# Altium PCB node_mcu.PcbDoc
Units mm, origin at the board's own origin, x right, y up, seen from the top; angles counter-clockwise.
Board outline 106.17 x 92.46 mm, 2 copper layers (Top Layer, Bottom Layer); 45 components, 41 nets, 167 pads, 0 vias.
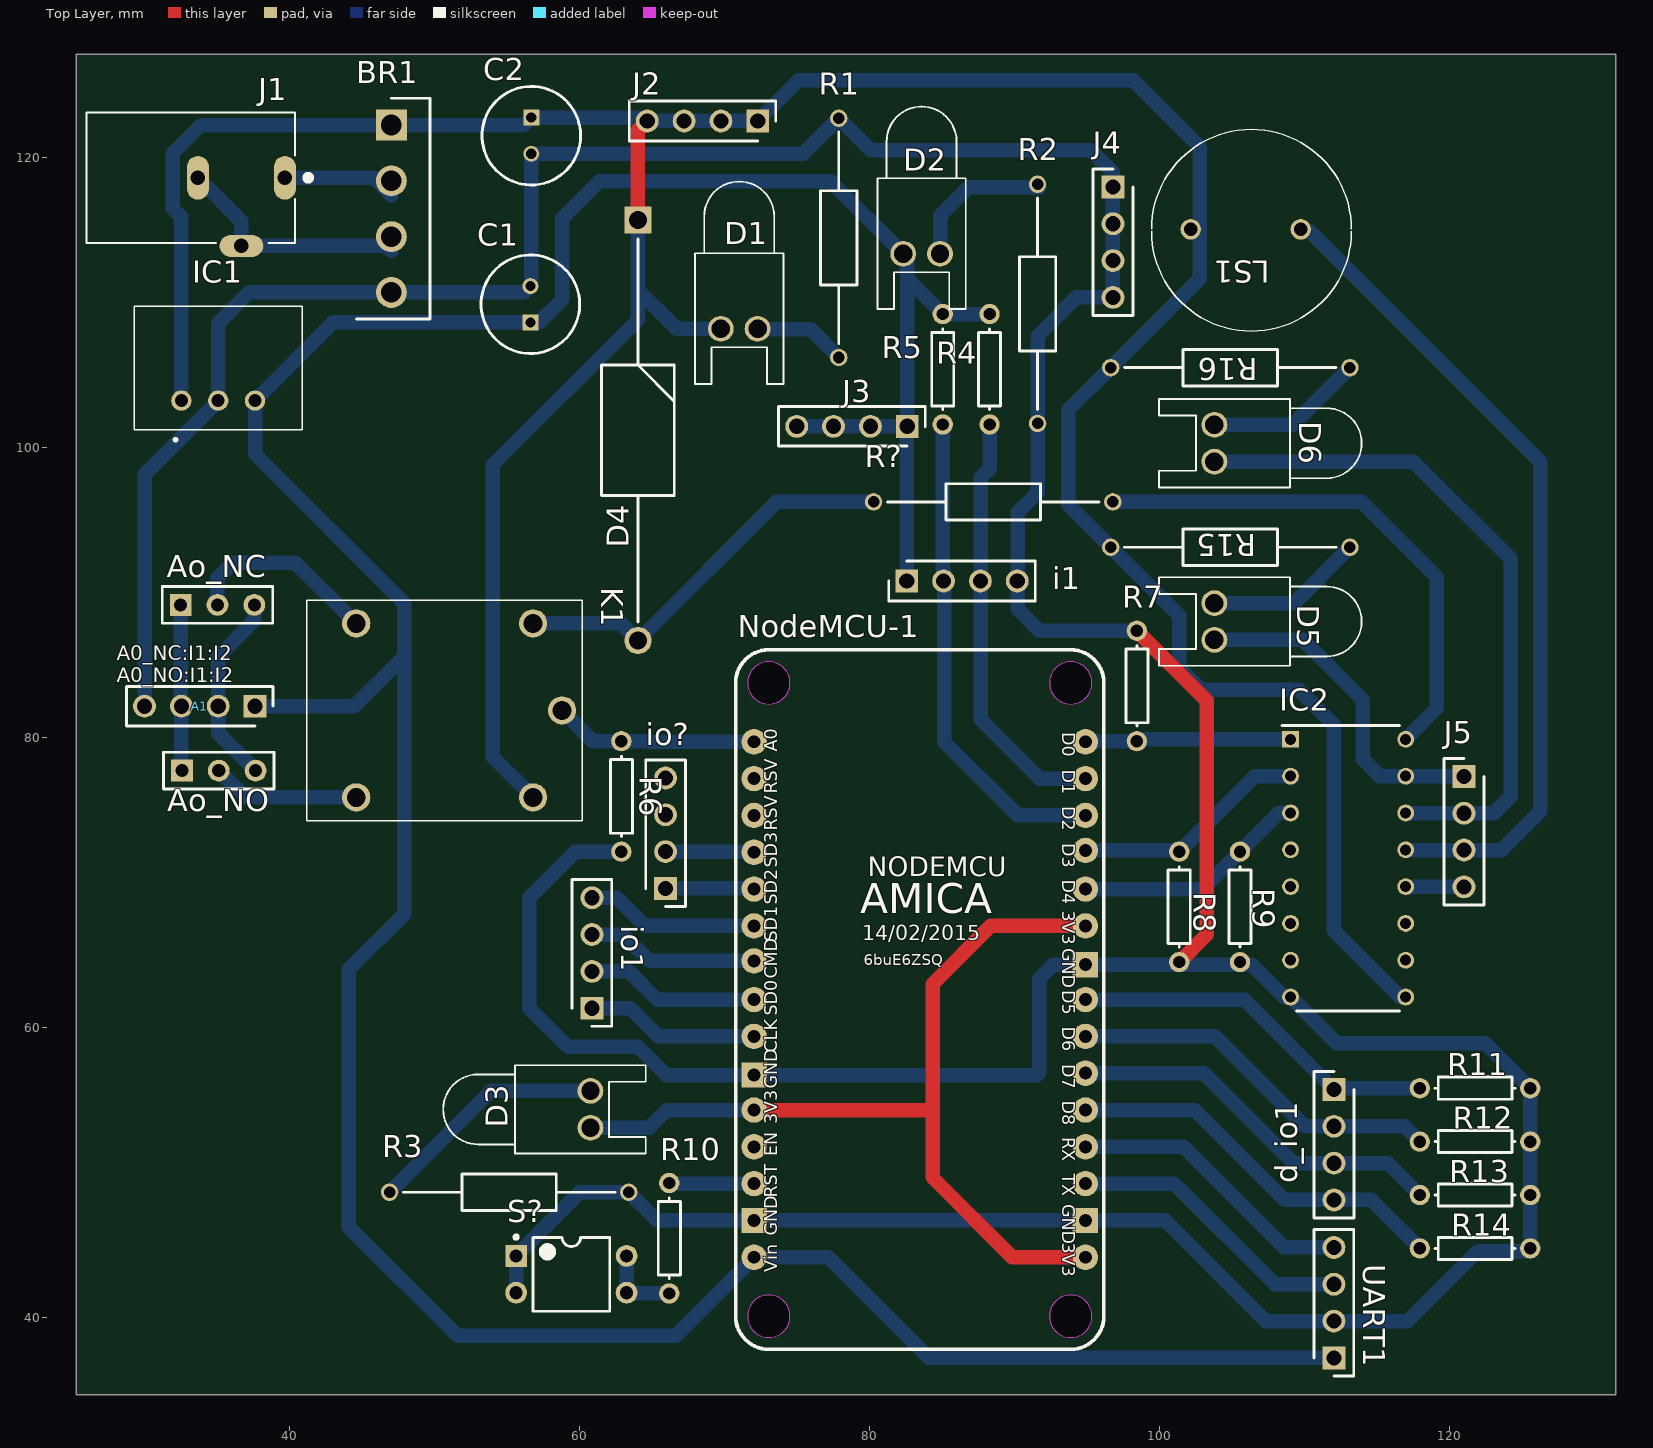
[diagram p0: Top Layer view]
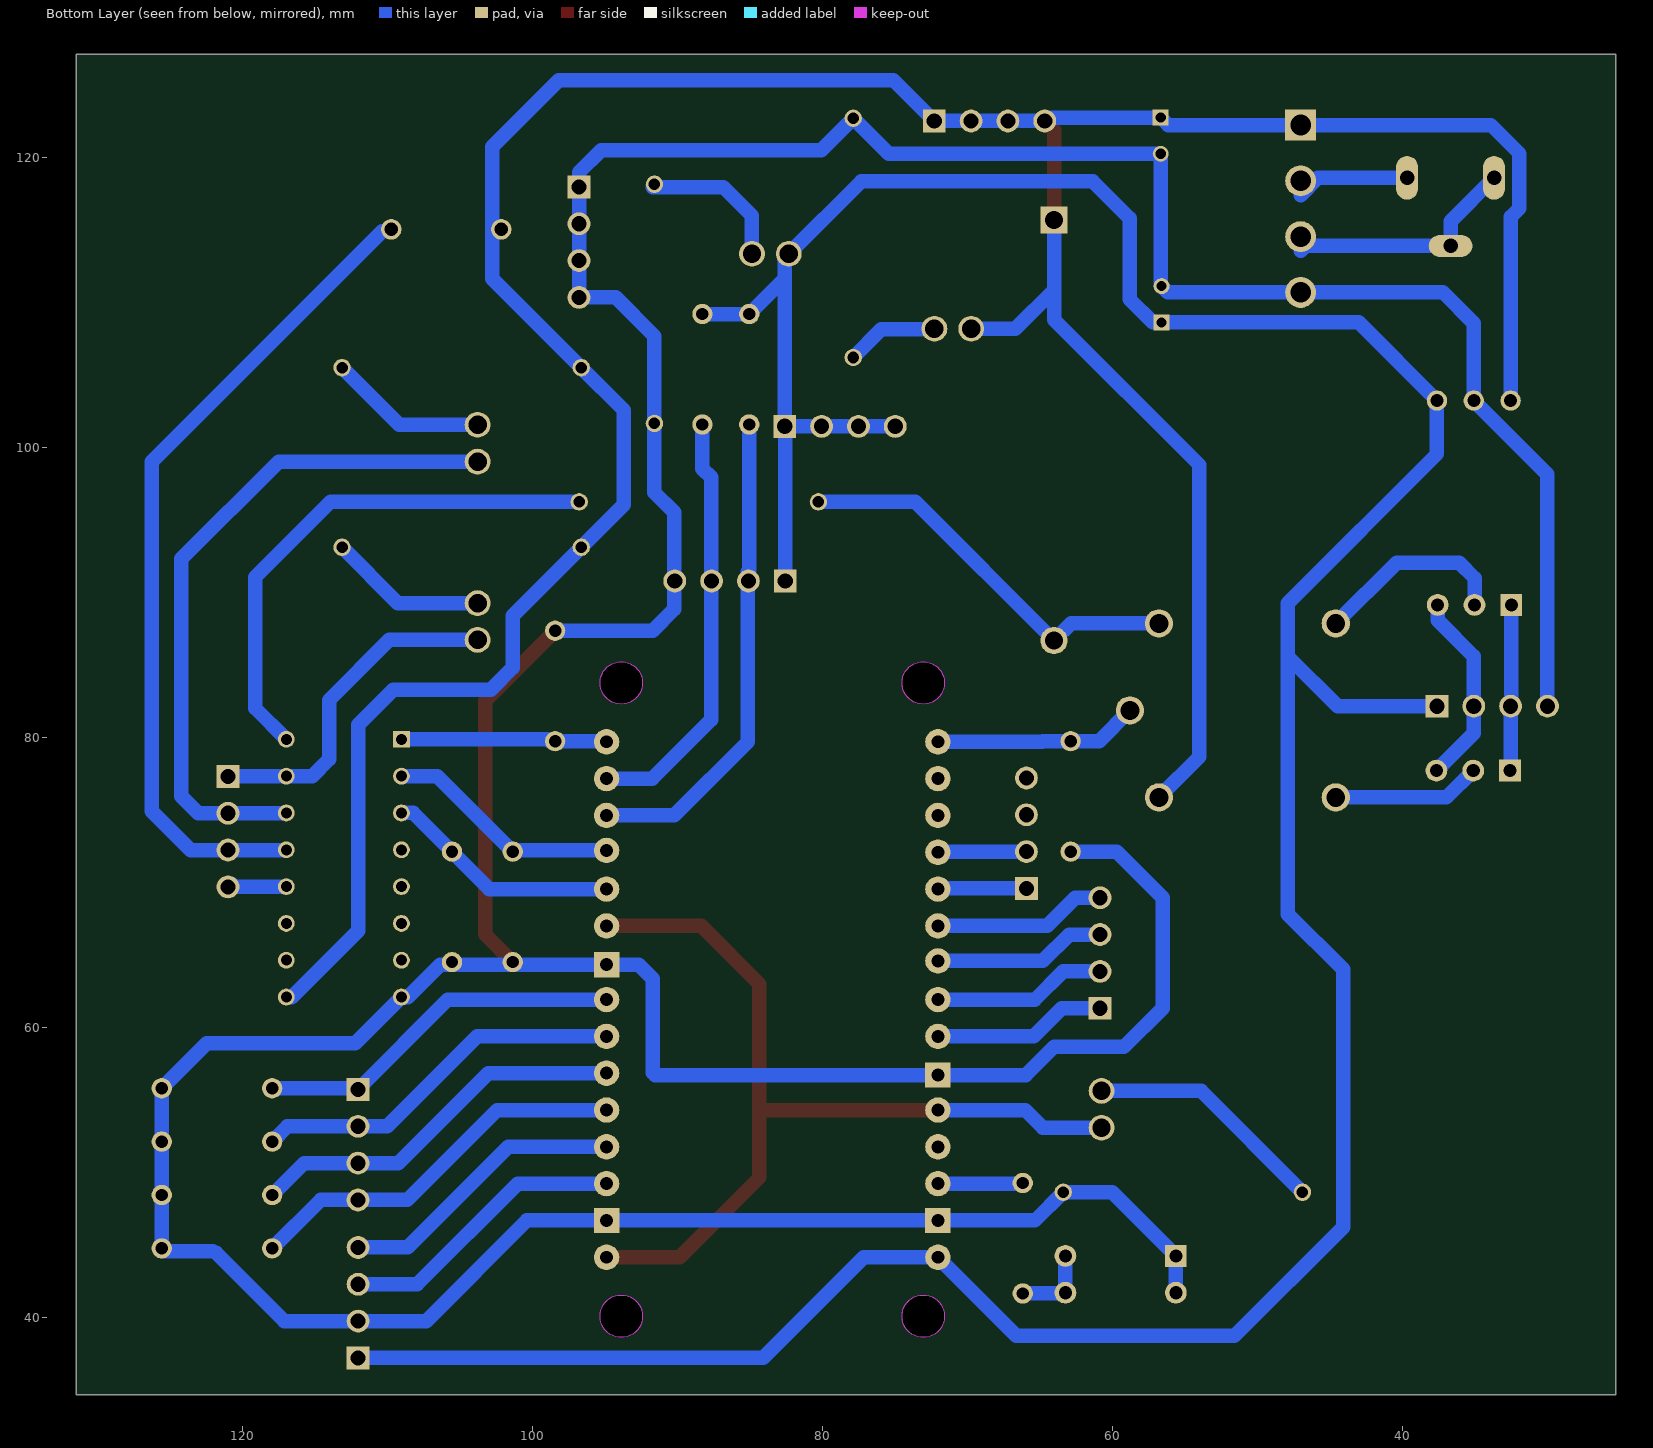
[diagram p1: Bottom Layer view, seen from below]
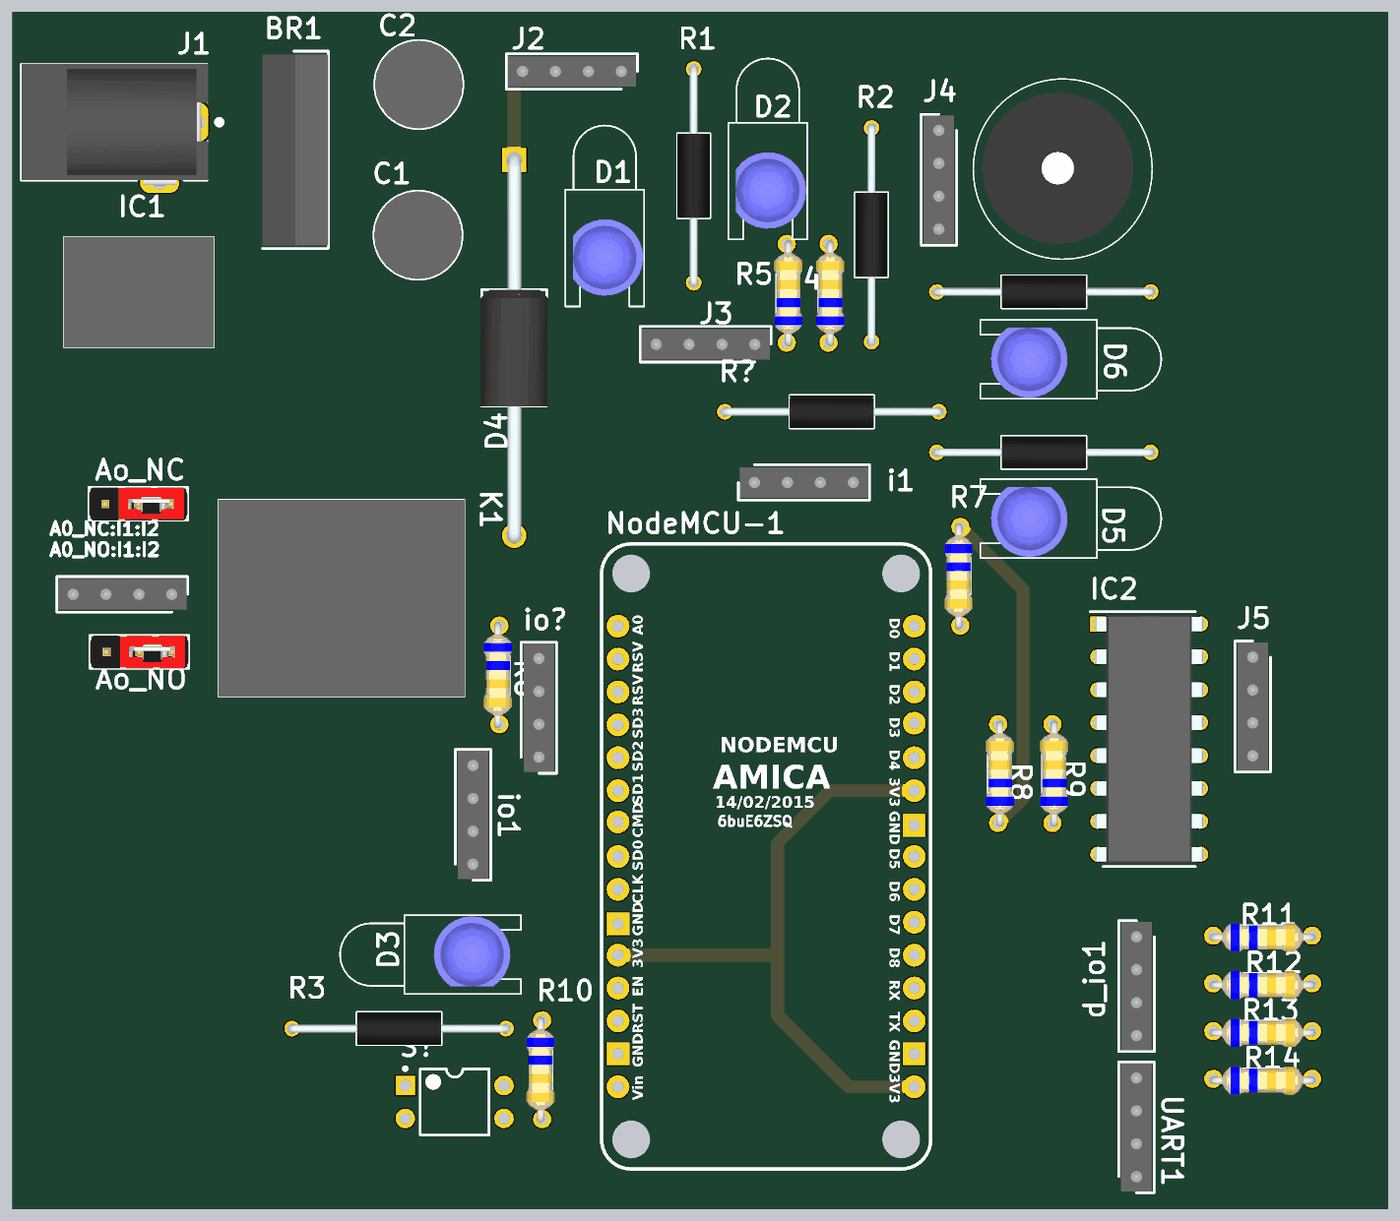
[diagram p2: 3D render of the assembled board from above, using the file's embedded part models]

## Layer stack, top to bottom
Top Solder: solder mask 0.0102, Solder Resist, Dk 3.5
Top Layer: signal copper 0.0356
Dielectric 1: dielectric 0.32, FR-4, Dk 4.8
Bottom Layer: signal copper 0.508
Bottom Solder: solder mask 0.0102, Solder Resist, Dk 3.5

## Board outline
131.445,127.127 131.445,34.671 25.273,34.671 25.273,127.127

## Design rules (kind name [scope] priority, off if disabled: settings)
Clearance Clearance_1 [All] p1: gap=0.5 ignorepadtopadclearanceinfootprint=FALSE
Clearance [All] p2: gap=0.5 ignorepadtopadclearanceinfootprint=FALSE
PolygonConnect [All] p1: connectstyle=Relief reliefconductorwidth=0.254 reliefentries=4 polygonreliefangle="90 Angle" airgapwidth=0.254
RoomDefinition bee_hive_1 [InComponentClass('bee_hive_1')] p1: confinementstyle=ConfineIn formatcopy=TRUE lockcomponents=FALSE outline 25.4,34.671 131.445,34.671 131.445,127.254 25.4,127.254
RoutingVias [All] p1: holewidth=0.711 width=1.27 viastyle="Through Hole" minholewidth=0.711 minwidth=1.27 maxholewidth=0.711 maxwidth=1.27
SolderMaskExpansion [All] p1: expansion=0.102
Width [All] p1: maxlimit=2 minlimit=0.5 preferedwidth=1 minimp=50.000000 maximp=50.000000 favimp=50.000000
30 further rules are at their usual default settings.

## Components (designator, comment, footprint, x,y, rotation, side; value= is the part's Value field where it differs from the comment)
A1 "A0" HDRV4W87P0X254_1X4_991X236X1155P 37.592,82.169 r180 top
Ao_NC "Header 3" HDR1X3 32.462,89.156 r0 top locked
Ao_NO "Header 3" HDR1X3 32.55,77.724 r0 top
BR1 "3KBP04M-E4_51" TO385P508X1473X1168-4P 46.998,122.259 r270 top
C1 "0.1uf" CAPPRD250W50D680H1250 56.587,108.644 r90 top
C2 "0.33uf" CAPPRD250W50D680H1250 56.65,122.774 r270 top
D1 "12v" LED-0 70.993,108.204 r180 top
D2 "5v" LED-0 83.574,113.376 r180 top
D3 "5v" LED-0 60.731,54.356 r270 top
D4 "1n4007" DIOAD2902W106L900D500 64.008,115.697 r270 top
D5 "5v" LED-0 103.771,88.011 r90 top
D6 "5v" LED-0 103.771,100.31 r90 top
d_io1 "d_io" HDRV4W87P0X254_1X4_991X236X1155P 112.024,55.726 r270 top
i1 "i2c" HDRV4W87P0X254_1X4_991X236X1155P 82.55,90.805 r0 top
IC1 "173950578" 173950578 32.512,103.251 r0 top
IC2 "ULN2003A" DIP794W56P254L1918H533Q16N 112.997,70.993 r0 top
io1 "io" HDRV4W87P0X254_1X4_991X236X1155P 60.833,61.334 r90 top
io? "io" HDRV4W87P0X254_1X4_991X236X1155P 65.913,69.596 r90 top
J1 "PJ-102B" *CUI_PJ-102B 33.155,118.618 r180 top
J2 "ip_vlts" HDRV4W87P0X254_1X4_991X236X1155P 72.271,122.537 r180 top
J3 "5v" HDRV4W87P0X254_1X4_991X236X1155P 82.581,101.473 r180 top
J4 "gnd" HDRV4W87P0X254_1X4_991X236X1155P 96.774,117.986 r270 top
J5 "0022032041" HDRV4W87P0X254_1X4_991X236X1155P 120.988,77.323 r270 top
K1 "0476618" 0476618 50.673,81.876 r180 top
LS1 "254-15210-ROX" 25415210ROX 102.138,115.062 r180 top
NodeMCU-1 "NodeMCU V1.0 ESP-12E" "NodeMCU V1.0 ESP-12E" 70.722,85.959 r0 top
R1 "1k" RESAD1650W60L650D250 77.859,122.724 r270 top
R2 "330E" RESAD1650W60L650D250 91.575,101.673 r90 top
R3 "100E" RESAD1650W60L650D250 63.373,48.641 r180 top
R4 "Res1" AXIAL-0.3 88.265,105.41 r90 top value=2.2K
R5 "Res1" AXIAL-0.3 85.033,105.41 r90 top value=2.2K
R6 "Res1" AXIAL-0.3 62.865,75.946 r270 top value=10K
R7 "Res1" AXIAL-0.3 98.425,83.566 r270 top value=10K
R8 "Res1" AXIAL-0.3 101.346,68.326 r90 top value=10K
R9 "Res1" AXIAL-0.3 105.537,68.326 r90 top value=10K
R10 "Res1" AXIAL-0.3 66.167,45.466 r270 top value=10K
R11 "Res1" AXIAL-0.3 121.753,55.813 r0 top value=10K
R12 "Res1" AXIAL-0.3 121.753,52.13 r0 top value=10K
R13 "Res1" AXIAL-0.3 121.753,48.447 r0 top value=10K
R14 "Res1" AXIAL-0.3 121.753,44.764 r0 top value=10K
R15 "1k" RESAD1650W60L650D250 96.62,93.13 r0 top
R16 "1k" RESAD1650W60L650D250 96.62,105.519 r0 top
R? "100E" RESAD1650W60L650D250 80.264,96.266 r0 top
S? "SW DIP-2" DIP-4 59.413,42.976 r0 top
UART1 "UART" HDRV4W87P0X254_1X4_991X236X1155P 112.014,37.211 r90 top

## Footprints (in the part's own frame and the unit in brackets; to place one, negate y for a bottom-side part, rotate by r counter-clockwise, add the part's x,y. Pads: shape width x height; smd on the part's side, far side on the other; paste and mask are expansions set on the pad)
0476618 [mm]
  round 1.95 hole 1.3: 1(-6.1,-6) 2(6.1,-6) 3(6.1,6) 4(-6.1,6) 5(-8.1,0)
  silkscreen extent -9.5,-7.6 9.5,7.6, body extent -9.5,-7.6 9.5,7.6, height 15
25415210ROX [mm]
  round 1.417 hole 0.911: 1(0,0) 2(-7.59,0)
  silkscreen extent -11.09,-6.9 2.7,7.02, body extent -9.66,-5.85 2.04,5.85, height 9.31
173950578 [mm]
  round 1.4 hole 0.9: 1(0,0) 2(2.54,0) 3(5.08,0)
  silkscreen extent -3.26,-2.8 8.34,6.5, body extent -3.26,-2 8.34,6.5, height 10.5
*CUI_PJ-102B [mm]
  oval 1.508x3.016 hole 1: 1(-6.5,0) 2(-0.5,0)
  oval 3.016x1.508 hole 1: 3(-3.5,4.7)
  silkscreen extent -8.3,-4.5 7.2,4.5, body extent -7.24,-4.52 7.16,4.88, height 11.01
AXIAL-0.3 [mm] "Axial Device, Thru-Hole; 2 Leads; 0.3 in Pin Spacing"
  round 1.4 hole 0.85: 1(-3.81,0) 2(3.81,0)
  silkscreen extent -2.77,-0.76 2.77,0.76, body extent -4.08,-1.27 4.08,1.02, height 2.44
CAPPRD250W50D680H1250 [mm]
  rect 1.1x1.1 hole 0.7: 1(0,0)
  round 1.1 hole 0.7: 2(2.5,0)
  silkscreen extent -2.15,-3.4 4.65,3.4, body extent -2.15,-3.4 4.65,3.4, height 12.5
DIOAD2902W106L900D500 [mm]
  rect 1.875x1.875 hole 1.25: 1(0,0)
  round 1.875 hole 1.25: 2(29,0)
  silkscreen extent 1.29,-2.5 27.71,2.5, body extent -0.53,-2.61 29.55,2.61, height 5.21
DIP794W56P254L1918H533Q16N [mm]
  rect 1.16x1.16 hole 0.76: 1(-3.97,8.89)
  round 1.16 hole 0.76: 2(-3.97,6.35) 3(-3.97,3.81) 4(-3.97,1.27) 5(-3.97,-1.27) 6(-3.97,-3.81) 7(-3.97,-6.35) 8(-3.97,-8.89) 9(3.97,-8.89) 10(3.97,-6.35) 11(3.97,-3.81) 12(3.97,-1.27) 13(3.97,1.27) 14(3.97,3.81) 15(3.97,6.35) 16(3.97,8.89)
  silkscreen extent -4.55,-9.84 3.55,9.84, body extent -4.11,-9.59 4.11,9.59, height 5.33
DIP-4 [mm] "DIP; 4 Leads; Row Spacing 7.62 mm; Pitch 2.54 mm"
  rect 1.5x1.5 hole 0.9: 1(-3.81,1.27)
  round 1.5 hole 0.9: 2(-3.81,-1.27) 3(3.81,-1.27) 4(3.81,1.27)
  silkscreen extent -3.93,-2.55 2.65,2.69, body extent -3.15,-2.5 3.15,2.5, height 5.6
HDR1X3 [mm] "Connector; Header; 3 Position"
  rect 1.5x1.5 hole 0.9: 1(0,0)
  round 1.5 hole 0.9: 2(2.54,0) 3(5.08,0)
  silkscreen extent -1.27,-1.27 6.35,1.27, body extent -1.27,-1.27 6.35,1.27, height 9
HDRV4W87P0X254_1X4_991X236X1155P [mm]
  rect 1.575x1.575 hole 1.05: 1(0,0)
  round 1.575 hole 1.05: 2(2.54,0) 3(5.08,0) 4(7.62,0)
  silkscreen extent -1.24,-1.37 8.86,1.37, body extent -1.14,-1.18 8.76,1.18, height 11.55
LED-0 [mil] "LED; 2 Leads"
  round 70 hole 50: 1(50,0) 2(-50,0)
  silkscreen extent -120,-400 120,150, body extent -116,-115 96,117, height 362
"NodeMCU V1.0 ESP-12E" [mil]
  round 115 hole 115 unplated paste-300 mask-300: 0(91,-1806) 0(91,-86) 0(911,-1806) 0(911,-86)
  round 69 hole 35: 3V3(51,-1246) 3V3(951,-1646) 3V3(951,-746) A0(51,-246) CLK(51,-1046) CMD(51,-841) D0(951,-246) D1(951,-346) D2(951,-446) D3(951,-541) D4(951,-646) D5(951,-946) D6(951,-1046) D7(951,-1146) D8(951,-1246) EN(51,-1346) RST(51,-1446) RSV(51,-446) RSV(51,-346) RX(951,-1346) SD0(51,-946) SD1(51,-746) SD2(51,-646) SD3(51,-546) TX(951,-1446) VIN(51,-1646)
  rect 69x69 hole 35: GND(51,-1546) GND(51,-1151) GND(951,-1546) GND(951,-851)
  Keep-Out Layer circle w2: c911,-1806 r57.5
  Keep-Out Layer circle w2: c91,-1806 r57.5
  Keep-Out Layer circle w2: c911,-86 r57.5
  Keep-Out Layer circle w2: c91,-86 r57.5
  silkscreen extent 1,-1896 1001,4
RESAD1650W60L650D250 [mm]
  round 1.2 hole 0.8: 1(0,0) 2(16.5,0)
  silkscreen extent 0.95,-1.25 15.55,1.25, body extent -0.3,-1.25 16.8,1.25, height 2.49
TO385P508X1473X1168-4P [mm]
  rect 2.13x2.13 hole 1.42: 1(0,0)
  round 2.13 hole 1.42: 2(3.85,0) 3(7.7,0) 4(11.55,0)
  silkscreen extent -1.85,-2.41 13.39,2.67, body extent -1.59,-2.41 13.14,2.67, height 11.17

## Part data
A1 d_io1 i1 io1 io? J2 J3 J4 UART1: library part 0022032041, "Connector", Manufacturer_Name=Molex, Mouser Part Number=N/A, Datasheet Link=http://www.molex.com/pdm_docs/sd/022032041_sd.pdf, Height=11.55mm, Manufacturer_Part_Number=0022032041, Mouser Price/Stock=https://www.mouser.com/Search/Refine.aspx?Keyword=N%2FA
Ao_NC Ao_NO: "Header, 3-Pin", LatestRevisionDate=17-Jul-2002, LatestRevisionNote="Re-released for DXP Platform.", Publisher="Altium Limited"
BR1: "Bridge Rectifier", Manufacturer_Name=Vishay, Manufacturer_Part_Number=3KBP04M-E4/51, Mouser Part Number=625-3KBP04M-E4, RS Part Number=8116150, Datasheet Link=https://www.vishay.com/docs/88888/3kbp08m.pdf, Height=5.08mm, Mouser Price/Stock=https://www.mouser.com/Search/Refine.aspx?Keyword=625-3KBP04M-E4, RS Price/Stock=https://uk.rs-online.com/web/p/products/8116150
C1 C2: library part BKME500ELL100MF11D, "Capacitor Polarised", Manufacturer_Name="United Chemi-Con", Mouser Part Number=661-BKME500ELL100MF1, Datasheet Link=http://www.mouser.com/datasheet/2/420/al-kmebp-e-140701-514734.pdf, Height=12.5mm, Manufacturer_Part_Number=BKME500ELL100MF11D, Mouser Price/Stock=https://www.mouser.com/Search/Refine.aspx?Keyword=661-BKME500ELL100MF1
D1 D2 D3 D5 D6: library part LED0, "Typical INFRARED GaAs LED", LatestRevisionDate=08-Jul-2005, LatestRevisionNote="Mech Layer 1 removed.", PackageDescription="LED; 2 Leads", PackageReference=LED-0, Published=8-Jun-2000, Publisher="Altium Limited"
D4: library part 1.5KE68CA-T, "Diode", Manufacturer_Name="Diodes Inc.", Mouser Part Number=621-1.5KE68CA-T, Datasheet Link=https://www.diodes.com/assets/Datasheets/ds21503.pdf, Manufacturer_Part_Number=1.5KE68CA-T, Mouser Price/Stock=https://www.mouser.com/Search/Refine.aspx?Keyword=621-1.5KE68CA-T
IC1: "Integrated Circuit", Manufacturer_Name="Wurth Elektronik", Mouser Part Number=710-173950578, RS Part Number=1447817P, Datasheet Link=https://katalog.we-online.com/pm/datasheet/173950578.pdf, Height=10.5mm, Manufacturer_Part_Number=173950578, Mouser Price/Stock=https://www.mouser.com/Search/Refine.aspx?Keyword=710-173950578, RS Price/Stock=http://uk.rs-online.com/web/p/products/1447817P
IC2: "Integrated Circuit", Manufacturer_Name=STMicroelectronics, Mouser Part Number=511-ULN2003A, RS Part Number=6868209, Allied_Number=70014189, Allied Price/Stock=http://www.alliedelec.com/stmicroelectronics-uln2003a/70014189/, ComponentLink1Description=datashet, ComponentLink1URL=https://www.seeedstudio.com/document/pdf/ULN2003%20Datasheet.pdf, Datasheet Link=http://www.st.com/web/en/resource/technical/document/datasheet/CD00001244.pdf, Height=5.33mm, Manufacturer_Part_Number=ULN2003A, Mouser Price/Stock=https://www.mouser.com/Search/Refine.aspx?Keyword=511-ULN2003A, RS Price/Stock=http://uk.rs-online.com/web/p/products/6868209
J5: "Connector", Manufacturer_Name=Molex, Mouser Part Number=N/A, Datasheet Link=http://www.molex.com/pdm_docs/sd/022032041_sd.pdf, Height=11.55mm, Manufacturer_Part_Number=0022032041, Mouser Price/Stock=https://www.mouser.com/Search/Refine.aspx?Keyword=N%2FA
K1: "Relay or Contactor", Manufacturer_Name="RS Components", ComponentLink1Description=datasheet, ComponentLink1URL=https://www.hobbytronics.co.uk/datasheets/songle-12v-relay.pdf, Datasheet Link=https://docs-emea.rs-online.com/webdocs/1583/0900766b81583163.pdf, Height=15mm, Manufacturer_Part_Number=0476618
LS1: "Loudspeaker or Buzzer", Manufacturer_Name=Kobitone, Datasheet Link=https://www.mouser.de/datasheet/2/209/KT-400269-1172018.pdf, Height=8.51mm, Manufacturer_Part_Number=254-15210-ROX
NodeMCU-1: "NodeMCU V1.0 ESP8266 (ESP-12E)"
R1 R2 R3 R15 R16 R?: library part MRS25000C1000FCT00, "Resistor", Manufacturer_Name=Vishay, Mouser Part Number=594-MRS25000C1000FCT, Datasheet Link=http://www.vishay.com/docs/28724/mrs16m25.pdf, Manufacturer_Part_Number=MRS25000C1000FCT00, Mouser Price/Stock=https://www.mouser.com/Search/Refine.aspx?Keyword=594-MRS25000C1000FCT
R4 R5 R6 R7 R8 R9 R10 R11 R12 R13 R14: "Resistor", LatestRevisionDate=17-Jul-2002, LatestRevisionNote="Re-released for DXP Platform.", PackageDescription="Axial Device, Thru-Hole; 2 Leads; 0.3 in Pin Spacing", PackageReference=AXIAL-0.3, Published=8-Jun-2000, Publisher="Altium Limited"
S?: "DIP Switch, 2 Position, SPST", LatestRevisionDate=17-Jul-2002, LatestRevisionNote="Re-released for DXP Platform.", PackageReference=DIP-4, Published=24-Mar-1999, Publisher="Altium Limited"

## Nets (pads, with @x,y where several pads share a name; then routed paths per layer and width w, separated by ;. In a path a pad name is that pad's centre, name@x,y a point inside that pad or via, vN(x,y) a via of type N, cw(c..) or ccw(c..) an arc to the next point about the centre after c; other vN are vias at no path point)
+5: A1.1 C1.1 D2.1 i1.1 IC1.3 J3.1 J3.2 J3.3 J3.4 NodeMCU-1.VIN R4.2 R5.2 UART1.1 | length 244.1
  Bottom Layer w1: A1.1 44.45,82.169 47.879,85.598 ; J3.4 J3.3 J3.2 J3.1 ; i1.1 82.55,101.442 J3.1 ; R4.2 R5.2 82.581,111.672 ; UART1.1 84.074,37.211 77.134,44.151 NodeMCU-1.VIN 66.601,38.735 51.562,38.735 44.069,46.228 44.069,64.008 47.879,67.818 47.879,85.598 ; 47.879,85.598 47.879,89.281 37.592,99.568 IC1.3 42.985,108.644 C1.1 57.209,108.644 58.801,110.236 58.801,115.824 61.341,118.364 77.316,118.364 D2.1 82.581,113.099 82.581,111.672 ; J3.1 82.581,111.672
GND: A1.4 BR1.4 C1.2 C2.2 i1.4 IC1.2 IC2.8 J4.1 J4.2 J4.3 J4.4 NodeMCU-1.GND R1.1 R2.1 R3.1 R6.2 R7.1 R8.1 R9.1 R11.2 R12.2 R13.2 R14.2 S?.1 S?.2 UART1.2 | length 359.3
  Top Layer w1: R7.1 103.251,82.55 103.251,66.421 R8.1
  Bottom Layer w1: A1.4 29.972,98.171 IC1.2 35.052,108.585 37.176,110.709 BR1.4 56.152,110.709 C1.2 56.65,111.207 C2.2 75.409,120.274 R1.1 80.061,120.523 95.25,120.523 96.774,118.999 J4.1 J4.2 J4.3 J4.4 94.237,110.366 91.575,107.704 R2.1 91.575,96.909 90.201,95.535 90.201,88.869 91.694,87.376 R7.1 ; S?.2 S?.1 59.998,48.641 R3.1 65.323,46.691 72.017,46.691 94.877,46.691 100.375,46.691 107.315,39.751 UART1.2 117.094,39.751 121.793,44.45 ; R6.2 59.69,72.136 56.515,68.961 56.515,61.341 59.182,58.674 64.008,58.674 65.958,56.724 72.017,56.724 91.522,56.724 91.694,56.896 91.694,63.373 92.665,64.344 94.877,64.344 106.344,64.344 108.585,62.103 IC2.8 112.202,58.928 122.448,58.928 R11.2 R12.2 R13.2 R14.2 125.376,44.577 122.047,44.577
NetA1_2: A1.2 Ao_NC.3 Ao_NO.3 | length 13.5
  Bottom Layer w1: Ao_NC.3 37.542,88.088 35.052,85.598 A1.2 35.052,80.302 Ao_NO.3
NetA1_3: A1.3 Ao_NC.1 Ao_NO.1 | length 11.7
  Bottom Layer w1: A1.3@32.462,81.915 Ao_NC.1 ; A1.3 32.512,77.762 Ao_NO.1
NetAo_NC_2: Ao_NC.2 K1.2 | length 13.6
  Bottom Layer w1: Ao_NC.2 35.002,91.009 36.068,92.075 40.374,92.075 K1.2
NetAo_NO_2: Ao_NO.2 K1.3 | length 10.2
  Bottom Layer w1: Ao_NO.2 36.938,75.876 K1.3
NetBR1_2: BR1.2 J1.1 | length 7.8
  Bottom Layer w1: J1.1 45.803,118.618 BR1.2@46.998,117.423
NetBR1_3: BR1.3 J1.2 J1.3 | length 16.4
  Bottom Layer w1: J1.2 36.655,115.618 J1.3 46.653,113.918 BR1.3@46.998,113.573
NetD1_2: D1.2 R1.2 | length 6.4
  Bottom Layer w1: D1.2@72.263,108.159 75.924,108.159 R1.2
NetD2_2: D2.2 R2.2 | length 10.3
  Bottom Layer w1: D2.2 84.844,115.993 86.834,117.983 R2.2@91.694,117.983
NetD3_1: D3.1 NodeMCU-1.3V3 | length 62.5
  Top Layer w1: NodeMCU-1.3V3@72.017,54.311 84.283,54.311 84.328,54.356 ; NodeMCU-1.3V3@94.877,44.151 89.834,44.151 84.328,49.657 84.328,54.356 ; NodeMCU-1.3V3@94.877,67.011 88.347,67.011 84.328,62.992 84.328,54.356
  Bottom Layer w1: D3.1 64.77,53.086 65.995,54.311 NodeMCU-1.3V3@72.017,54.311
NetD3_2: D3.2 R3.2 | length 16.8
  Bottom Layer w1: R3.2 53.858,55.626 D3.2
NetD4_2: D4.2 K1.1 R?.1 | length 27.9
  Bottom Layer w1: K1.1 62.829,87.876 D4.2 73.577,96.266 R?.1
NetD5_1: D5.1 R15.2 | length 10.9
  Bottom Layer w1: D5.1 109.271,89.281 R15.2
NetD5_2: D5.2 IC2.15 J5.1 | length 23.9
  Bottom Layer w0: IC2.15@116.906,77.323 IC2.15@116.987,77.323
  Bottom Layer w1: D5.2 109.855,86.741 114.022,82.574 114.022,78.51 115.189,77.343 IC2.15 116.987,77.323 J5.1 J5.1@120.781,77.53
NetD6_1: D6.1 R16.2 | length 11
  Bottom Layer w1: D6.1 109.181,101.58 R16.2
NetD6_2: D6.2 IC2.14 J5.2 | length 47.3
  Bottom Layer w1: D6.2 117.495,99.04 124.206,92.329 124.206,75.946 123.043,74.783 J5.2 116.987,74.783 IC2.14
Netd_io1_1: d_io1.1 NodeMCU-1.D5 R11.1 | length 25.7
  Bottom Layer w1: NodeMCU-1.D5 105.819,61.931 d_io1.1 112.112,55.813 R11.1
Netd_io1_2: d_io1.2 NodeMCU-1.D6 R12.1 | length 26.1
  Bottom Layer w1: NodeMCU-1.D6 103.804,59.391 110.009,53.186 d_io1.2 116.888,53.186 R12.1
Netd_io1_3: d_io1.3 NodeMCU-1.D7 R13.1 | length 26.5
  Bottom Layer w1: NodeMCU-1.D7 103.042,56.851 109.247,50.646 d_io1.3 115.745,50.646 R13.1
Netd_io1_4: d_io1.4 NodeMCU-1.D8 R14.1 | length 27
  Bottom Layer w1: NodeMCU-1.D8 102.407,54.311 108.612,48.106 d_io1.4 114.602,48.106 R14.1
Neti1_2: i1.2 NodeMCU-1.D2 R5.1 | length 33.8
  Bottom Layer w1: R5.1 85.033,91.528 85.121,91.44 85.121,79.725 90.215,74.631 NodeMCU-1.D2
Neti1_3: i1.3 NodeMCU-1.D1 R4.1 | length 29.5
  Bottom Layer w1: R4.1 88.265,98.552 87.661,97.948 87.661,91.44 87.661,81.249 91.739,77.171 NodeMCU-1.D1
NetIC2_1: IC2.1 NodeMCU-1.D0 R7.2 | length 14.2
  Bottom Layer w1: NodeMCU-1.D0 94.922,79.756 98.806,79.756 98.933,79.883 IC2.1
NetIC2_2: IC2.2 NodeMCU-1.D3 R8.2 | length 16.3
  Bottom Layer w1: NodeMCU-1.D3 101.264,72.218 R8.2 106.553,77.343 IC2.2
NetIC2_3: IC2.3 NodeMCU-1.D4 R9.2 | length 16.3
  Bottom Layer w1: NodeMCU-1.D4 102.952,69.551 R9.2 108.204,74.803 IC2.3
NetIC2_12: IC2.12 J5.4 | length 4.3
  Bottom Layer w1: IC2.12 116.987,69.703 J5.4 J5.4@120.781,69.91
NetIC2_13: IC2.13 J5.3 LS1.2 | length 57
  Bottom Layer w1: LS1.2@110.345,114.935 126.238,99.042 126.238,74.93 123.551,72.243 J5.3 116.987,72.243 IC2.13
NetIC2_16: IC2.16 R?.2 | length 36.6
  Bottom Layer w1: R?.2 113.919,96.266 119.126,91.059 119.126,82.042 IC2.16
Netio1_1: io1.1 NodeMCU-1.CLK | length 12.1
  Bottom Layer w1: io1.1 63.469,61.334 65.412,59.391 NodeMCU-1.CLK NodeMCU-1.CLK@71.928,59.302
Netio1_2: io1.2 NodeMCU-1.SD0 | length 12
  Bottom Layer w1: io1.2 63.38,63.874 65.323,61.931 NodeMCU-1.SD0
Netio1_3: io1.3 NodeMCU-1.CMD | length 12.2
  Bottom Layer w1: io1.3 62.961,66.414 64.777,64.598 NodeMCU-1.CMD NodeMCU-1.CMD@71.801,64.382
Netio1_4: io1.4 NodeMCU-1.SD1 | length 12.1
  Bottom Layer w1: io1.4 62.542,68.954 64.486,67.011 NodeMCU-1.SD1 NodeMCU-1.SD1@71.928,66.922
Netio?_1: io?.1 NodeMCU-1.SD2 | length 6.1
  Bottom Layer w1: io?.1 71.972,69.596 NodeMCU-1.SD2
Netio?_2: io?.2 NodeMCU-1.SD3 | length 6.1
  Bottom Layer w1: io?.2 71.972,72.136 NodeMCU-1.SD3
NetK1_5: K1.5 NodeMCU-1.A0 R6.1 | length 14.1
  Bottom Layer w1: K1.5 60.893,79.756 64.77,79.756 64.815,79.711 NodeMCU-1.A0
NetNodeMCU-1_RST: NodeMCU-1.RST R10.1 | length 5.9
  Bottom Layer w1: R10.1 66.212,49.231 NodeMCU-1.RST
NetNodeMCU-1_RX: NodeMCU-1.RX UART1.4 | length 20.3
  Bottom Layer w1: NodeMCU-1.RX 101.645,51.771 108.585,44.831 UART1.4 UART1.4@112.268,44.831
NetNodeMCU-1_TX: NodeMCU-1.TX UART1.3 | length 20
  Bottom Layer w1: NodeMCU-1.TX 101.01,49.231 107.95,42.291 UART1.3
NetR10_2: R10.2 S?.3 S?.4 | length 5.5
  Bottom Layer w1: S?.3 S?.3@63.246,41.683 ; S?.4@63.246,44.196 S?.3@63.246,41.683 ; R10.2 63.273,41.656 S?.3@63.246,41.683
VCC: BR1.1 C2.1 D1.1 D4.1 IC1.1 IC2.9 J2.1 J2.2 J2.3 J2.4 K1.4 LS1.1 R15.1 R16.1 | length 227.8
  Top Layer w1: D4.1 64.008,121.894 J2.4
  Bottom Layer w1: IC1.1 32.512,115.915 31.901,116.526 31.901,120.293 33.867,122.259 BR1.1 56.135,122.259 C2.1 64.414,122.774 J2.4 J2.3 ; K1.4 53.975,78.674 53.975,98.806 64.008,108.839 64.008,110.871 ; D4.1 64.008,110.871 ; J2.3@67.318,122.41 J2.3 ; D1.1 66.675,108.204 64.008,110.871 ; IC2.9 116.586,62.103 112.014,66.675 112.014,80.899 109.601,83.312 102.87,83.312 101.346,84.836 101.346,88.404 R15.1 93.699,96.051 93.699,102.598 R16.1 102.755,111.654 102.755,114.935 102.755,120.765 98.171,125.349 75.083,125.349 J2.1 J2.2 J2.3
pads on no net: IC2.4 IC2.5 IC2.6 IC2.7 IC2.10 IC2.11 io?.3 io?.4 NodeMCU-1.0 NodeMCU-1.EN NodeMCU-1.RSV
copper on no net: | length 0.2
  Bottom Layer w1: 65.913,77.216 65.958,77.171 ; 71.972,74.676 72.017,74.631 ; 71.972,77.216 72.017,77.171

## Polygon pours and split planes (outlines as drawn)
no net on Bottom Layer "Bottom Layer-No Net" (solid, pour order 0): 25.273,126.873

## Silkscreen, mask and mechanical layers (free items; w line width, h text height)
Top Overlay:
  text "A0_NC:I1:I2 / A0_NO:I1:I2" at 28.067,83.82 h1
outline:
  lines w1: 130.81,35.433 25.908,35.433 25.908,126.619 130.937,126.619 130.937,35.306
Mechanical 13:
  lines w0.254: 130.81,35.687 130.81,126.238 130.683,126.365 25.908,126.365 25.908,35.56 26.035,35.433 130.81,35.433 130.81,36.068

## Text inside footprints (layer, text, board x,y; h text height)
NodeMCU-1: Top Overlay "14/02/2015" at 79.485,65.69 h1.75; Top Overlay "AMICA" at 79.332,67.189 h3.56; Top Overlay "NODEMCU" at 79.866,69.983 h2.29; Top Overlay "6buE6ZSQ" at 79.586,64.293 h0.76; Top Overlay "CLK" at 73.922,58.273 h1.52 r90; Top Overlay "SD0" at 73.922,60.824 h1.52 r90; Top Overlay "SD1" at 73.922,65.926 h1.52 r90; Top Overlay "SD2" at 73.922,68.477 h1.52 r90; Top Overlay "SD3" at 73.922,71.028 h1.52 r90; Top Overlay "RSV" at 73.922,73.579 h1.52 r90; Top Overlay "RSV" at 73.922,76.13 h1.52 r90; Top Overlay "A0" at 73.922,79.025 h1.52 r90; Top Overlay "D5" at 92.972,62.566 h1.52 r270; Top Overlay "GND" at 92.972,65.462 h1.52 r270; Top Overlay "3V3" at 92.972,68.052 h1.52 r270; Top Overlay "D4" at 92.972,70.211 h1.52 r270; Top Overlay "D3" at 92.972,72.711 h1.52 r270; Top Overlay "D2" at 92.972,75.251 h1.52 r270; Top Overlay "D1" at 92.972,77.797 h1.52 r270; Top Overlay "D0" at 92.972,80.371 h1.52 r270; Top Overlay "CMD" at 73.922,63.375 h1.52 r90; Top Overlay "D6" at 92.972,60.048 h1.52 r270; Top Overlay "3V3" at 92.972,45.167 h1.52 r270; Top Overlay "GND" at 92.972,47.803 h1.52 r270; Top Overlay "TX" at 92.972,49.917 h1.52 r270; Top Overlay "RX" at 92.972,52.43 h1.52 r270; Top Overlay "D8" at 92.972,54.943 h1.52 r270; Top Overlay "D7" at 92.972,57.48 h1.52 r270; Top Overlay "Vin" at 73.922,43.11 h1.52 r90; Top Overlay "GND" at 73.922,45.65 h1.52 r90; Top Overlay "RST" at 73.922,48.266 h1.52 r90; Top Overlay "EN" at 73.922,51.111 h1.52 r90; Top Overlay "3V3" at 73.922,53.32 h1.52 r90; Top Overlay "GND" at 73.922,55.784 h1.52 r90